# EAGLE board Dummy Micro SD Card (EAGLE 5.10)

Size 11 x 15 mm. Coordinates in mm from the lower left corner, seen from the top.
Outline: 11,8.2 11,7.2 arc-90 10.8,7 10.5,7 arc90 10.3,6.8 10.3,6.1 arc46 10.5,5.6 10.8,5.3 arc-44 11,4.8 11,0.8 arc-90 10.2,0 0.8,0 arc-90 0,0.8 0,14.2 arc-90 0.8,15 8.8,15 arc-90 9.6,14.2 9.6,10.3 arc46 9.8,9.8
Outline: 11,8.2 11,8.3
Outline: 10.3,9.3 10.8,8.8 arc-44 11,8.3
Outline: 10.3,9.3 10,9.6
Outline: 10,9.6 9.8,9.8
Outline: 10.3,9.3 10,9.6
Outline: 10,9.6 9.8,9.8
Outline: 11,8.2 11,8.3
Outline: 11,8.2 11,8.3
Outline: 11,8.2 11,8.3
Outline: 10,9.6 9.8,9.8
Copper layers (1*16): Top 0.035mm / dielectric 1.5mm / Bottom 0.035mm
Design rules "default": minimum track width 10mil, minimum drill 24mil, track to track 8mil, track to pad 8mil, pad to pad 8mil, via to via 8mil, smd to smd 8mil, copper to edge 40mil, drill to drill 8mil, minimum pad ring 10mil, minimum via ring 8mil, stop-mask expansion 4mil, vias tented up to drill 0mil, thermal gap 10mil

## Placement (x,y rotation side)
E$1  [X-IO_TECHNOLOGIES_LOGO_10MM]  7,2.75 90 top

## Library data of the parts
E$1 = x-io

## Text on the board
tNames: Dummy micro SD card